# Altium PCB Motor-42-ClosedLoop.PcbDoc
Units mm, origin at the board's own origin, x right, y up, seen from the top; angles counter-clockwise.
Board outline 42 x 42 mm, 2 copper layers (Top Layer, Bottom Layer), stack 1.571 mm thick; 47 components, 20 nets, 212 pads, 76 vias.
Unrouted connection lines stored in the file: 36.
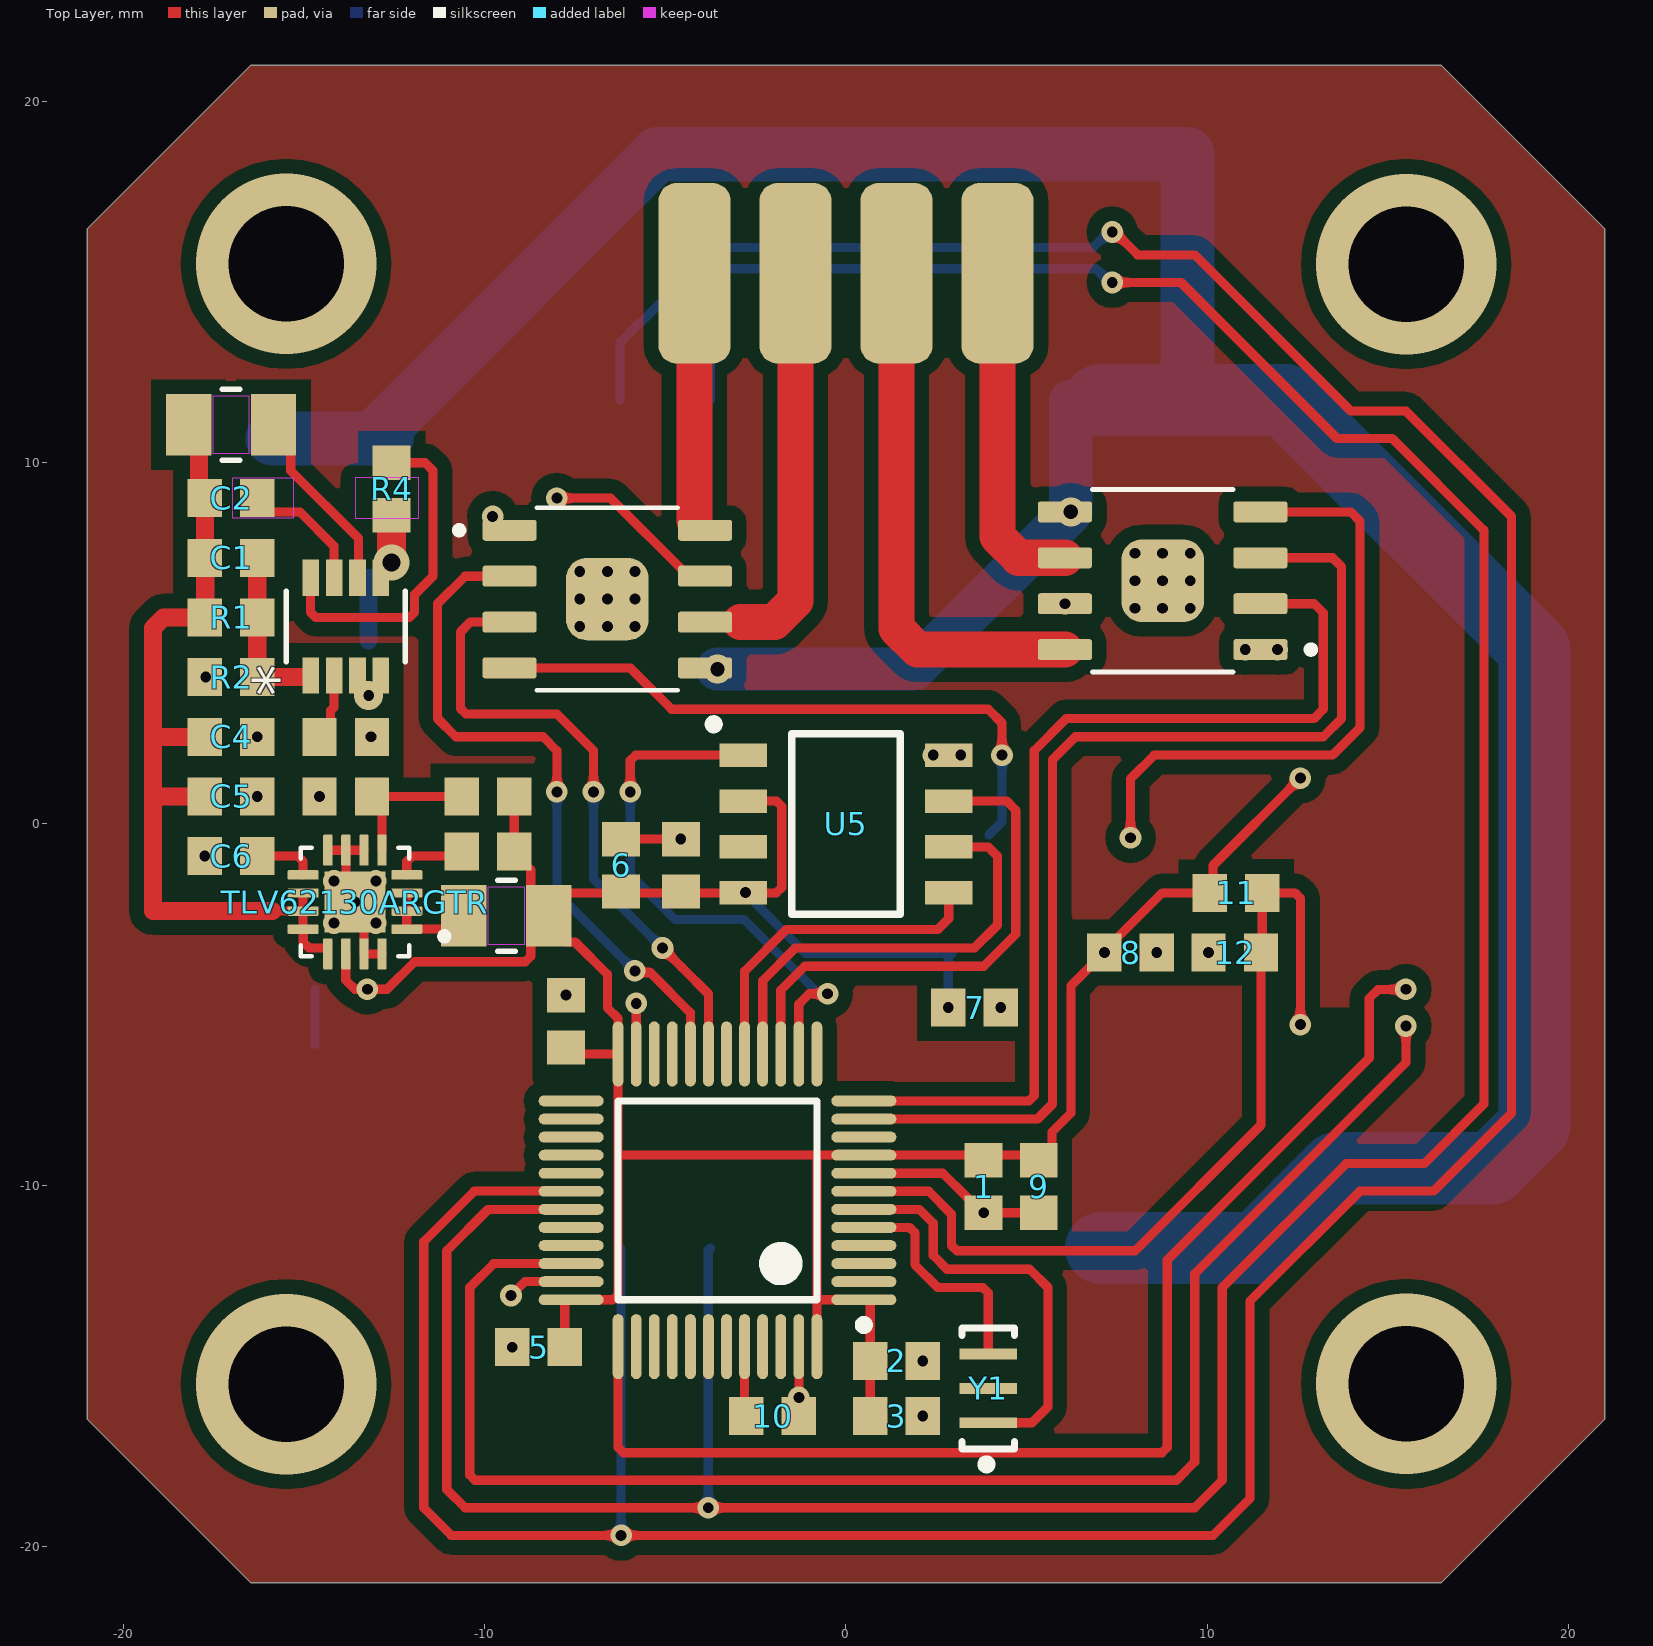
[diagram p0: Top Layer view]
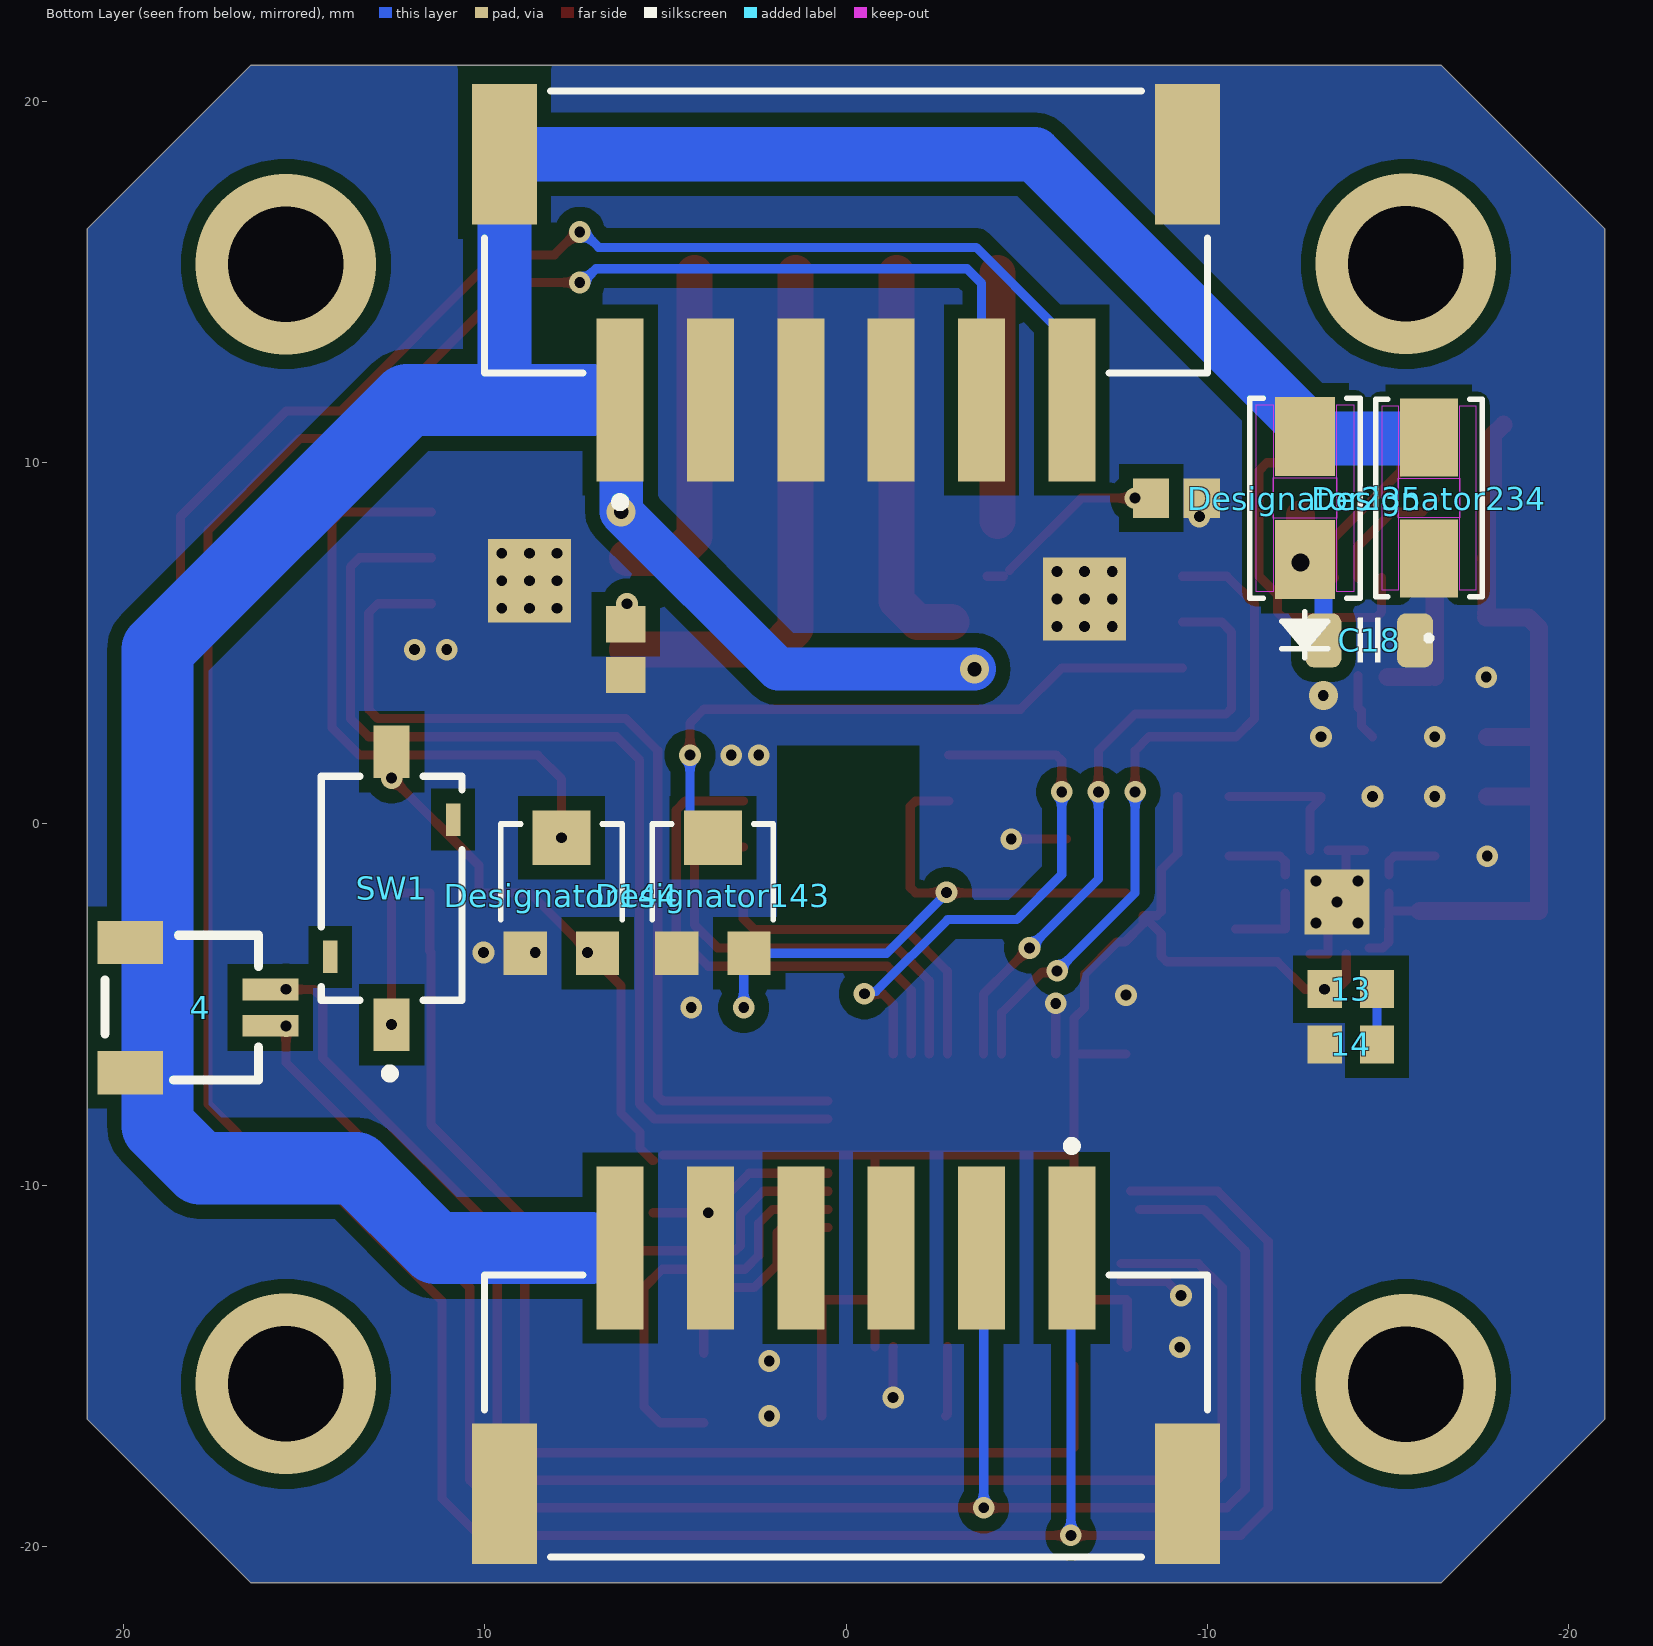
[diagram p1: Bottom Layer view, seen from below]

## Layer stack, top to bottom
Top Solder: solder mask 0.0102, Solder Resist, Dk 3.5
Top Layer: signal copper 0.0356
Dielectric 1: dielectric 1.5, FR-4, Dk 4.8
Bottom Layer: signal copper 0.0356
Bottom Solder: solder mask 0.0102, Solder Resist, Dk 3.5

## Board outline
-21,-16.465 -16.465,-21 16.465,-21 21,-16.465 21,16.465 16.465,21 -16.465,21 -21,16.465

## Design rules (kind name [scope] priority, off if disabled: settings)
Clearance [All] p1: gap=0 ignorepadtopadclearanceinfootprint=TRUE
Clearance Clearance_net [InNetClass('All Nets') vs InNetClass('All Nets')] p2: gap=0.01 ignorepadtopadclearanceinfootprint=FALSE
PolygonConnect [All] p1: connectstyle=Direct reliefconductorwidth=0.254 reliefentries=4 polygonreliefangle="90 Angle" airgapwidth=0.254
RoutingVias [All] p1: holewidth=0.711 width=1.27 viastyle="Through Hole" minholewidth=0.1 minwidth=0.1 maxholewidth=5 maxwidth=5
SolderMaskExpansion [All] p1: expansion=0.102 istentingtop=FALSE
Width [All] p1: maxlimit=3 minlimit=0.254 preferedwidth=0.254
30 further rules are at their usual default settings.

## Classes and differential pairs
component class Motor-42-ClosedLoop: C1 C2 C6 R1 R2 R4 U5

## Components (designator, comment, footprint, x,y, rotation, side; value= is the part's Value field where it differs from the comment)
1 "22uF" CAPC1608X90X35ML10T15 3.81,-10.033 r90 top (schematic designator C5)
2 "22uF" CAPC1608X90X35ML10T15 1.397,-14.859 r0 top (schematic designator C5)
3 "22uF" CAPC1608X90X35ML10T15 1.397,-16.383 r0 top (schematic designator C5)
4 "Comment" SM02B-SRSS-TB(LF)(SN) 17.907,-5.08 r270 bottom
5 "22uF" CAPC1608X90X35ML10T15 -8.509,-14.478 r0 top (schematic designator C5)
6 "22uF" CAPC1608X90X35ML10T15 -6.223,-1.143 r270 top (schematic designator C5)
7 "22uF" CAPC1608X90X35ML10T15 3.556,-5.08 r0 top (schematic designator C5)
8 "22uF" CAPC1608X90X35ML10T15 7.874,-3.556 r0 top (schematic designator C5)
9 "22uF" CAPC1608X90X35ML10T15 5.334,-10.033 r90 top (schematic designator C5)
10 "22uF" CAPC1608X90X35ML10T15 -2.032,-16.383 r0 top (schematic designator C5)
11 "22uF" CAPC1608X90X35ML10T15 10.795,-1.905 r0 top (schematic designator C5)
12 "22uF" CAPC1608X90X35ML10T15 10.758,-3.556 r0 top (schematic designator C5)
13 "22uF" CAPC1608X90X35ML10T15 -13.97,-4.572 r0 bottom (schematic designator C5)
14 "22uF" CAPC1608X90X35ML10T15 -13.97,-6.096 r0 bottom (schematic designator C5)
C1 "12pF" CAPC1608X90X35ML10T15 -17.018,7.366 r180 top
C2 "10nF" CAPC1608X90X35ML10T15 -17.018,9.017 r180 top
C4 "100uF" CAPC1608X90X35ML10T15 -17.018,2.413 r180 top
C5 "22uF" CAPC1608X90X35ML10T15 -4.572,-1.143 r270 top
C5 "22uF" CAPC1608X90X35ML10T15 -7.747,-5.461 r270 top
C5 "10uF" CAPC1608X90X35ML10T15 -17.018,0.762 r180 top (schematic designator C3)
C6 "3.3nF" CAPC1608X90X35ML10T15 -17.018,-0.889 r0 top (schematic designator C4)
C18 "100uF" 1206-CAP -14.478,5.08 r180 bottom value=0.1u (schematic designator C10)
Designator143 "Comment" EVM-3ESX50B14_PAN 3.683,-2.032 r180 bottom
Designator144 "Comment" EVM-3ESX50B14_PAN 7.874,-2.032 r180 bottom
Designator234 "Comment" SDO_DO-214AC_CIP -16.129,9.017 r90 bottom
Designator235 "Comment" SMASeries_LTF -12.7,9.017 r90 bottom
R1 "110K" RESC1608X55X30ML20T20#1 -17.018,5.715 r180 top
R2 "15K" RESC1608X55X30ML20T20#1 -17.018,4.064 r0 top
R3 "47K" RESC1608X55X30ML20T20#1 -13.843,2.413 r180 top
R4 "47K" RESC1608X55X30ML20T20#1 -12.573,9.271 r270 top
R5 "100K" RESC1608X55X30ML20T20#1 -9.906,-0.762 r180 top
R6 "750K" RESC1608X55X30ML20T20#1 -9.906,0.762 r180 top
R7 "240K" RESC1608X55X30ML20T20#2 -9.144,9.017 r180 bottom
R7 "240K" RESC1608X55X30ML20T20#2 6.096,4.826 r90 bottom
R7 "240K" RESC1608X55X30ML20T20#1 -13.843,0.762 r0 top
SW1 "PTS636 SKG25 SMTR LFS" FP-PTS636_SKG25_SMTR_LFS-MFG 12.573,-1.778 r90 bottom
TLV62130ARGTR "Comment" QFN50P300X300X100-17N -13.589,-2.159 r180 top
U5 "MT6816" SOIC127P600X175-8N-8-V 0,0 r0 top
Y1 "" FP-CSTCE_V-MFG 3.937,-15.621 r90 top
? "Comment" IND_EPCOS_B82498F_EPC -9.398,-2.54 r0 top
? "Comment" IND_EPCOS_B82498F_EPC -17.018,11.049 r180 top
? "Comment" FP-S6B-XH-SM4-TB_LF_SN-MFG 0,16.383 r0 bottom
? "Comment" FP-S6B-XH-SM4-TB_LF_SN-MFG 0,-16.383 r180 bottom
? "Comment" SOIC127P599X175-9N 8.763,6.731 r180 top
? "Comment" SOIC127P599X175-9N -6.604,6.223 r0 top
? "Comment" LQFP48_N -3.556,-10.414 r180 top
? "Comment" TSOT_303AIC_SGY -13.843,5.461 r90 top

## Footprints (in the part's own frame and the unit in brackets; to place one, negate y for a bottom-side part, rotate by r counter-clockwise, add the part's x,y. Pads: shape width x height; smd on the part's side, far side on the other; paste and mask are expansions set on the pad)
1206-CAP [mm]
  rrect50% 1x1.5 smd: 1(-1.27,0) 2(1.27,0)
  silkscreen extent -0.3,-0.61 0.3,0.61, body extent -1.5,-0.75 1.5,0.75, height 1.5
CAPC1608X90X35ML10T15 [mm] "Chip Capacitor, 2-Leads, Body 1.60x0.80mm, IPC Low Density"
  rect 0.95x1.05 smd: 1(-0.725,0) 2(0.725,0)
  body extent -0.85,-0.45 0.85,0.45, height 0.9
EVM-3ESX50B14_PAN [mil]
  rect 47x47 smd paste+0 mask+0: 1(-39.38,-60.75) 3(39.37,-60.75)
  rect 62.99x59.06 smd paste+0 mask+0: 2(0,65)
  silkscreen extent -66,-25 66,80
FP-CSTCE_V-MFG [mm]
  rect 0.3x1.6 smd paste+0 mask+0: 1(-0.95,0) 2(0,0) 3(0.95,0)
  silkscreen extent -2.22,-0.72 1.68,0.72, body extent -1.78,-0.9 1.78,0.9, height 0.25
FP-PTS636_SKG25_SMTR_LFS-MFG [mm]
  rect 1.45x1 smd paste+0 mask+0: 1(-3.775,0) 2(3.775,0)
  rect 0.9x0.4 smd paste+0 mask+0: 3(-1.9,1.7) 4(1.9,-1.7)
  silkscreen extent -5.25,-1.95 3.1,1.95, body extent -4,-1.85 4,1.85, height 2.75
FP-S6B-XH-SM4-TB_LF_SN-MFG [mm]
  rect 1.3x4.5 smd paste+0 mask+0: 1(6.25,4.65) 2(3.75,4.65) 3(1.25,4.65) 4(-1.25,4.65) 5(-3.75,4.65) 6(-6.25,4.65)
  rect 1.8x3.9 smd paste+0 mask+0: 7(-9.45,-2.15) 8(9.45,-2.15)
  silkscreen extent -10,-3.9 10,7.6, body extent -9.97,-3.9 9.97,6.1, height 6
IND_EPCOS_B82498F_EPC [mil]
  rect 49.5x67 smd paste+0 mask+0: 1(-46.25,0) 2(46.25,0)
  Top Layer keep-out region: -19.5,-31.5 -19.5,31.5 19.5,31.5 19.5,-31.5
  silkscreen extent -9,-38 9,38, body extent -46,-34 46,34, height 55
LQFP48_N [mm] "Thin QFP, 48-Leads, Body 7x7mm, Pitch 0.5mm, IPC Medium Density"
  oval 1.8x0.3 smd: 1(-4.05,2.75) 2(-4.05,2.25) 3(-4.05,1.75) 4(-4.05,1.25) 5(-4.05,0.75) 6(-4.05,0.25) 7(-4.05,-0.25) 8(-4.05,-0.75) 9(-4.05,-1.25) 10(-4.05,-1.75) 11(-4.05,-2.25) 12(-4.05,-2.75) 25(4.05,-2.75) 26(4.05,-2.25) 27(4.05,-1.75) 28(4.05,-1.25) 29(4.05,-0.75) 30(4.05,-0.25) 31(4.05,0.25) 32(4.05,0.75) 33(4.05,1.25) 34(4.05,1.75) 35(4.05,2.25) 36(4.05,2.75)
  oval 0.3x1.8 smd: 13(-2.75,-4.05) 14(-2.25,-4.05) 15(-1.75,-4.05) 16(-1.25,-4.05) 17(-0.75,-4.05) 18(-0.25,-4.05) 19(0.25,-4.05) 20(0.75,-4.05) 21(1.25,-4.05) 22(1.75,-4.05) 23(2.25,-4.05) 24(2.75,-4.05) 37(2.75,4.05) 38(2.25,4.05) 39(1.75,4.05) 40(1.25,4.05) 41(0.75,4.05) 42(0.25,4.05) 43(-0.25,4.05) 44(-0.75,4.05) 45(-1.25,4.05) 46(-1.75,4.05) 47(-2.25,4.05) 48(-2.75,4.05)
  silkscreen extent -4.18,-2.75 2.75,3.57, body extent -3.5,-3.5 3.5,3.5, height 1.6
QFN50P300X300X100-17N [mm]
  rrect25% 0.86x0.26 smd: 1(-1.435,0.75) 2(-1.435,0.25) 3(-1.435,-0.25) 4(-1.435,-0.75) 9(1.435,-0.75) 10(1.435,-0.25) 11(1.435,0.25) 12(1.435,0.75)
  rrect25% 0.26x0.86 smd: 5(-0.75,-1.435) 6(-0.25,-1.435) 7(0.25,-1.435) 8(0.75,-1.435) 13(0.75,1.435) 14(0.25,1.435) 15(-0.25,1.435) 16(-0.75,1.435)
  rect 1.68x1.68 smd paste-0.31: 17(0,0)
  round 0.4 hole 0.3 mask+0: 18(0,0) 19(-0.58,0.58) 20(0.58,0.58) 21(-0.58,-0.58) 22(0.58,-0.58)
  silkscreen extent -2.57,-1.5 1.5,1.5, body extent -1.5,-1.5 1.5,1.5, height 1
RESC1608X55X30ML20T20#1 [mm] "Chip Resistor, 2-Leads, Body 1.60x0.80mm, IPC Low Density"
  rect 0.95x1.05 smd: 1(-0.725,0) 2(0.725,0)
  body extent -0.9,-0.5 0.9,0.5, height 0.55
RESC1608X55X30ML20T20#2 [mm] "Chip Resistor, 2-Leads, Body 1.60x0.80mm, IPC Low Density"
  rect 1x1.1 smd: 1(-0.7,0) 2(0.7,0)
  body extent -0.9,-0.5 0.9,0.5, height 0.55
SDO_DO-214AC_CIP [mil]
  rect 85x63 smd paste+0 mask+0: 1(-66,0) 2(66,0)
  Top Layer keep-out region: -100.5,-51 -100.5,-33.5 100.5,-33.5 100.5,-51
  Top Layer keep-out region: -100.5,33.5 -100.5,51 100.5,51 100.5,33.5
  Top Layer keep-out region: -21.5,-33.5 -21.5,33.5 21.5,33.5 21.5,-33.5
  Keep-Out Layer region: -21.5,-33.5 -21.5,33.5 21.5,33.5 21.5,-33.5
  silkscreen extent -155,-58 108,58, body extent -103,-53 103,53, height 89
SM02B-SRSS-TB(LF)(SN) [mm]
  rect 0.6x1.55 smd: 1(-0.5,1.975) 2(0.5,1.975)
  rect 1.2x1.8 smd: 3(-1.8,-1.9) 4(1.8,-1.9)
  silkscreen extent -2,-2.6 2,1.65
SMASeries_LTF [mil]
  rect 86x65 smd paste+0 mask+0: 1(-67,0) 2(67,0)
  Top Layer keep-out region: -102,-53 -102,-34.5 102,-34.5 102,-53
  Top Layer keep-out region: -102,34.5 -102,53 102,53 102,34.5
  Top Layer keep-out region: -22,-34.5 -22,34.5 22,34.5 22,-34.5
  Keep-Out Layer region: -22,-34.5 -22,34.5 22,34.5 22,-34.5
  silkscreen extent -174,-60 109,60, body extent -104,-55 104,55, height 92
SOIC127P599X175-9N [mm]
  rrect25% 1.5x0.58 smd: 1(-2.705,1.905) 2(-2.705,0.635) 3(-2.705,-0.635) 4(-2.705,-1.905) 5(2.705,-1.905) 6(2.705,-0.635) 7(2.705,0.635) 8(2.705,1.905)
  rrect50% 2.285x2.285 smd paste-2: 9(0,0)
  silkscreen extent -4.2,-2.52 1.95,2.52, body extent -3,-2.45 3,2.45, height 1.75
SOIC127P600X175-8N-8-V [mm]
  rect 1.31x0.65 smd: 1(-2.845,1.905) 2(-2.845,0.635) 3(-2.845,-0.635) 4(-2.845,-1.905) 5(2.845,-1.905) 6(2.845,-0.635) 7(2.845,0.635) 8(2.845,1.905)
  silkscreen extent -3.78,-2.5 1.5,2.88, body extent -3,-2.5 3,2.5, height 1.75
TSOT_303AIC_SGY [mil]
  rect 39.5x18 smd paste+0 mask+0: 1(-53.25,38.39) 2(-53.25,12.8) 3(-53.25,-12.8) 4(-53.25,-38.39) 5(53.25,-38.39) 7(53.25,12.8) 8(53.25,38.39)
  rect 39.5x18 smd paste+0: 6(53.25,-12.8)
  silkscreen extent -39,-65 39,65, body extent -59,-60 59,60, height 43

## Part data
1 2 3 5 6 7 8 9 10 11 12 13 14 C1 C2 C4 C5 C5 C5 C6: library part CMP-2006-02924-1, Manufacturer=Murata, PART NUMBER=GRM188R71H472KA01D
C18: library part µçÈÝ-1206, "Capacitor"
R1 R2 R3 R4 R5 R6 R7 R7 R7: library part CMP-2000-00054-1, Manufacturer=Panasonic, PART NUMBER=ERA3AEB392V
SW1: library part CMP-10040-000025-1, "TACT 6.0 X 3.5, 2.5 MM H, 250GF,"
U5: library part TLE5012B_E1000, "TLE5012B/TLI5012B Angular and Linear Position Sensor Evaluation Board Automotive", Package="SOIC-8 Infineon Technologies", Availability="In Stock", Check_prices=https://www.snapeda.com/parts/TLE5012B%20E1000/Infineon+Technologies/view-part/?ref=eda, MF="Infineon Technologies", MP="TLE5012B E1000", Price=None, SnapEDA_Link=https://www.snapeda.com/parts/TLE5012B%20E1000/Infineon+Technologies/view-part/?ref=snap
Y1: library part CMP-06057-000013-1, "CERAMIC RES 20.0000MHZ 15PF SMD", Capacitance=15pF, Case/Package=SMD/SMT, Frequency=20MHz, Frequency Stability=0.3%, Frequency Tolerance=0.5%, Max Operating Temperature=80°C, Min Operating Temperature=-20°C, Package Quantity=3000, Resistor Type=Ceramic, Contact Plating=Gold, Height=0.039inch, Impedance=40R, Lead Free="Lead Free", Length=0.126inch, Load Capacitance=15pF, Mount="Surface Mount", Number of Pins=3, Packaging="Tape and Reel", REACH SVHC="No SVHC", Self Resonant Frequency=20MHz, Termination=SMD/SMT, Tolerance=0.5%, Width=0.051inch

## Free pads (board coordinates)
  rrect50% 2x5 smd: 5(-4.191,15.24) 5(-1.397,15.24) 5(1.397,15.24) 5(4.191,15.24)
  rect 2.3x2.3 smd far side: 7(-6.604,6.223) 7(8.763,6.731)
  rect 1.8x1.8 smd far side: 8(-13.589,-2.159)

## Via types
v1: diameter 0.6, hole 0.3, Top Layer to Bottom Layer, 68 vias
v2: diameter 5, hole 3.2, Top Layer to Bottom Layer, 4 vias
v3: diameter 0.8, hole 0.4, Top Layer to Bottom Layer, 2 vias
v4: diameter 1, hole 0.5, Top Layer to Bottom Layer, 1 vias
v5: diameter 0.8, hole 0.3, Top Layer to Bottom Layer, 1 vias

## Nets (pads, with @x,y where several pads share a name; then routed paths per layer and width w, separated by ;. In a path a pad name is that pad's centre, name@x,y a point inside that pad or via, vN(x,y) a via of type N, cw(c..) or ccw(c..) an arc to the next point about the centre after c; other vN are vias at no path point)
CANH: ?.1@-6.25,-11.733 ?.6@-6.25,11.733 ?.30 | length 105.5
  Top Layer w0.254: ?.30@-7.874,-10.16 -10.287,-10.16 -11.684,-11.557 -11.684,-18.923 -10.922,-19.685 v1(-6.223,-19.685) 10.16,-19.685 11.176,-18.669 11.176,-13.208 14.224,-10.16 16.256,-10.16 18.415,-8.001 18.415,-2.413 18.415,-1.274 18.415,8.509 15.494,11.43 13.97,11.43 9.652,15.748 8.069,15.748 7.434,16.383 v1(7.366,16.383)
  Bottom Layer w0.254: ?.1@-6.25,-11.733 -6.223,-11.76 v1(-6.223,-19.685) ; ?.6@-6.25,11.733 -6.25,13.333 -5.727,13.856 -5.702,13.856 -3.6,15.958 6.847,15.958 7.272,16.383 v1(7.366,16.383)
CANL: ?.2@-3.75,-11.733 ?.5@-3.75,11.733 ?.31 | length 97.6
  Top Layer w0.254: ?.31@-8.128,-10.668 -9.906,-10.668 -11.049,-11.811 -11.049,-18.415 -10.541,-18.923 v1(-3.81,-18.923) 9.652,-18.923 10.414,-18.161 10.414,-12.827 13.843,-9.398 16.002,-9.398 17.653,-7.747 17.653,8.128 15.113,10.668 13.589,10.668 9.271,14.986 v1(7.366,14.986)
  Bottom Layer w0.254: v1(-3.81,-18.923) -3.81,-11.793 ?.2@-3.75,-11.733 ; ?.5@-3.75,11.733 -3.75,14.964 -3.347,15.367 6.917,15.367 7.298,14.986 v1(7.366,14.986)
GND: 1.1 2.2 3.2 5.1 6.1 7.2 8.2 9.1 10.2 12.1 14.2 ?.1@11.468,4.826 ?.1@-9.309,8.128 ?.2@3.75,11.733 ?.3@1.25,11.733 ?.3@-13.518,4.108 ?.4@-1.25,11.733 ?.4@-12.868,4.108 ?.5@3.75,-11.733 ?.7@9.45,-18.533 ?.7@-9.45,18.533 ?.8@0.494,-9.664 ?.8@-9.45,-18.533 ?.9@8.763,6.731 ?.9@-6.604,6.223 ?.23 ?.35 ?.47 C4.1 C5.1 C6.1 C18.2 Designator143.1 Designator144.1 Designator234.1 pad.7 pad.8 R2.1 R3.1 R7.1@6.096,4.126 R7.1@-14.568,0.762 R7.2@-9.844,9.017 TLV62130ARGTR.6 TLV62130ARGTR.7 TLV62130ARGTR.8 TLV62130ARGTR.15 TLV62130ARGTR.16 TLV62130ARGTR.17 TLV62130ARGTR.18 TLV62130ARGTR.19 TLV62130ARGTR.20 TLV62130ARGTR.21 TLV62130ARGTR.22 U5.8 | length 15.5
  Top Layer w0.254: TLV62130ARGTR.8 TLV62130ARGTR.7 ; TLV62130ARGTR.6 TLV62130ARGTR.7 ; TLV62130ARGTR.16 TLV62130ARGTR.15 -13.339,-2.449 -13.589,-2.199 v1(-13.589,-2.159) -13.589,-2.119 -13.839,-1.869 TLV62130ARGTR.7 ; v1(-9.271,-13.048) -8.887,-12.664 ?.35 ; 6.1@-6.096,-0.418 v1(-4.572,-0.418) ; ?.23 v1(-5.806,-4.963) ; ?.47 -1.297,-14.473 -1.297,-15.848 10.2@-1.27,-15.875 ; ?.8@0.494,-9.664 2.679,-9.664 1.1@3.366,-10.351 ; 1.1@3.76,-10.758 v1(3.81,-10.758) 9.1
  other v1: 2.122,-16.383 -1.304,-15.872 2.122,-14.859 -9.234,-14.478 4.281,-5.08 -7.747,-4.736 8.599,-3.556 10.033,-3.556 -14.169,-2.739 -13.009,-2.739 -14.169,-1.579 -13.009,-1.579 -17.743,-0.889 -16.293,0.762 -14.568,0.762 2.413,1.905 3.175,1.905 -16.293,2.413 -13.143,2.413 -17.718,4.064 11.049,4.826 11.938,4.826 -7.366,5.461 -6.604,5.461 -5.842,5.461 8.001,5.969 8.763,5.969 9.525,5.969 -7.366,6.223 -6.604,6.223 -5.842,6.223 8.001,6.731 8.763,6.731 9.525,6.731 -7.366,6.985 -6.604,6.985 -5.842,6.985 8.001,7.493 8.763,7.493 9.525,7.493 -9.779,8.509
  other v5: -13.208,3.556
NetC1_1: ?.1@-14.818,4.108 C1.1 R1.1 R2.2 | length 4.4
  Top Layer w0.5: R2.2 R1.1 ; R1.1@-16.293,5.74 C1.1 ; R2.2@-16.129,4.064 ?.1@-14.986,4.064
NetC2_1: ?.7@-14.168,6.814 C2.1 | length 3.6
  Top Layer w0.254: C2.1 -16.293,8.984 -15.945,8.636 -15.113,8.636 -14.168,7.691 ?.7@-14.168,6.814
NetC4_2: C6.2 TLV62130ARGTR.9 | length 1.7
  Top Layer w0.254: C6.2 -15.173,-0.889 -15.024,-1.038 TLV62130ARGTR.9
NetL1_1: ?.1@-15.843,11.049 ?.6@-13.518,6.814 | length 4.3
  Top Layer w0.254: ?.1@-15.367,10.287 -15.367,9.779 -13.491,7.903 -13.491,6.841 ?.6@-13.518,6.814
NetL2_1: ?.1@-10.573,-2.54 TLV62130ARGTR.1 TLV62130ARGTR.2 TLV62130ARGTR.3 | length 2.4
  Top Layer w0.254: TLV62130ARGTR.3 TLV62130ARGTR.2 TLV62130ARGTR.1 ?.1@-10.774,-2.909
NetP1_2: 4.1 ?.37 | length 33.4
  Top Layer w0.254: ?.37@-6.306,-15.007 -6.306,-17.25 -6.157,-17.399 8.741,-17.399 8.89,-17.25 8.89,-12.065 14.478,-6.477 14.478,-4.826 14.724,-4.58 v1@15.494,-4.58
  other v1: 15.494,-4.572
NetP1_3: 4.2 ?.34 | length 43.1
  Top Layer w0.254: ?.34 -9.751,-12.164 -10.414,-12.827 -10.414,-18.012 -10.265,-18.161 9.144,-18.161 9.652,-17.653 9.652,-12.446 15.494,-6.604 v1@15.494,-5.58
  other v1: 15.494,-5.588
NetR3_2: ?.2@-14.168,4.108 R3.2 | length 1.9
  Top Layer w0.254: R3.2 -14.262,2.719 -14.262,3.137 -14.168,3.231 ?.2@-14.168,4.108
NetR4_1: ?.8@-14.818,6.814 R4.1 | length 9.3
  Top Layer w0.254: ?.8@-14.818,6.814 -14.818,5.864 -14.669,5.715 -12.087,5.715 -11.938,5.864 -11.938,6.35 -11.43,6.858 -11.43,9.779 -11.647,9.996 R4.1
NetR5_2: R5.2 TLV62130ARGTR.4 | length 2
  Top Layer w0.254: TLV62130ARGTR.4 -12.154,-1.038 -12.005,-0.889 R5.2@-10.606,-0.889
NetR6_2: R6.2 R7.2@-13.118,0.762 TLV62130ARGTR.5 | length 4.1
  Top Layer w0.254: R7.2@-13.143,0.712 -12.839,0.408 TLV62130ARGTR.5 ; R7.2@-13.143,0.762 R6.2@-10.606,0.762
NetU3_1: ?.33
NetU3_4: ?.32
NetU3_8: ?.25
VCC_3V3: 1.2 2.1 3.1 5.2 6.2 7.1 8.1 9.2 11.1 13.2 ?.1@0.494,-13.164 ?.2@-8.223,-2.54 ?.9@0.494,-9.164 ?.24 ?.36 ?.48 C5.2@-4.572,-1.868 C5.2@-7.747,-6.186 Designator143.3 Designator144.3 R5.1 R6.1 SW1.2 TLV62130ARGTR.14 U5.2 U5.4 | length 80.3
  Top Layer w0.254: TLV62130ARGTR.14 -13.841,-3.596 -13.841,-4.32 -13.589,-4.572 -12.7,-4.572 -11.938,-3.81 -8.874,-3.81 -8.725,-3.661 -8.725,-3.042 ?.2@-8.223,-2.54 ; R6.1 R5.1 -9.181,-0.812 -8.725,-1.268 -8.725,-2.418 -8.603,-2.54 ?.2@-8.223,-2.54 ; 5.2 -7.784,-13.185 -7.763,-13.164 ?.36 -6.455,-13.164 -6.306,-13.015 ?.24 ; C5.2@-7.747,-6.364 ?.24 ; ?.2@-7.747,-1.905 U5.4 U5.4@-2.781,-1.905 ; -6.223,-9.164 -0.806,-9.164 ; U5.2 -1.927,0.635 -1.778,0.486 -1.778,-1.756 -1.927,-1.905 U5.4@-2.781,-1.905 ; v1(-2.781,-1.892) U5.4@-2.781,-1.905 ; ?.48 -0.806,-13.208 ; 3.1 2.1 0.672,-13.185 0.651,-13.164 0.494,-13.164 -0.762,-13.164 -0.806,-13.208 ; 9.2@5.06,-9.164 0.494,-9.164 -0.806,-9.164 ; 9.2 5.356,-9.308 5.704,-8.96 5.704,-8.52 6.223,-8.001 6.223,-4.482 v1(7.149,-3.556) 7.149,-3.506 8.75,-1.905 11.1 10.155,-1.82 10.155,-1.148 v1(12.573,1.27) ; ?.2@-8.223,-2.54 -8.223,-2.762 -7.722,-3.264 -7.499,-3.264 -6.604,-4.159 -6.604,-5.08 -6.309,-5.375 -6.309,-6.361 ?.24 ; -0.806,-13.208 -0.806,-9.164
  Bottom Layer w0.254: v1(-2.781,-1.892) -2.781,-1.918 -1.124,-3.575 Designator143.3 2.937,-3.575 2.831,-3.681 v1(2.831,-5.08)
  other v1: -13.245,-4.572
VCC_5V: ?.2@-18.193,11.049 C1.2 C2.2 C4.2 C5.2@-17.743,0.762 R1.2 TLV62130ARGTR.10 TLV62130ARGTR.11 TLV62130ARGTR.12 TLV62130ARGTR.13 | length 23.7
  Top Layer w0.254: -15.875,-2.413 -15.871,-2.409 TLV62130ARGTR.11 ; TLV62130ARGTR.12 TLV62130ARGTR.11 ; TLV62130ARGTR.10 TLV62130ARGTR.11 ; TLV62130ARGTR.12@-15.017,-2.912 -15.017,-3.271 -14.859,-3.429 -14.478,-3.429
  Top Layer w0.5: -19.136,0.762 C5.2@-17.743,0.762 ; ?.2@-18.193,11.049 -17.907,10.763 -17.907,9.181 C2.2 C1.2 ; C4.2 -19.177,2.413 ; R1.2@-17.718,5.715 -18.884,5.715 -19.177,5.422 -19.177,2.413 ; R1.2@-17.718,5.842 -17.73,5.854 -17.73,7.328 C1.2@-17.718,7.341 ; -15.875,-2.413 -19.177,-2.413 -19.177,2.413
VCC_24V: 4.3 4.4 ?.1@6.25,11.733 ?.5@6.058,8.636 ?.5@-3.899,4.318 ?.5@-12.868,6.814 ?.6@6.25,-11.733 ?.8@9.45,18.533 C18.1 Designator234.2 Designator235.1 Designator235.2 R4.2 | length 95.7
  Top Layer w0.8: v4(-12.573,7.239) R4.2
  Bottom Layer w0.254: Designator235.1@-13.208,6.807 Designator235.1 ; ?.8@8.933,19.05 ?.8@9.45,18.533 ; 9.45,12.062 9.779,11.733
  Bottom Layer w0.5: C18.1 Designator235.1@-13.208,6.807
  Bottom Layer w1.2: v3(-3.556,4.288) 1.875,4.288 v3(6.223,8.636) ?.1@6.223,11.706
  Bottom Layer w1.5: Designator234.2@-15.869,10.668 Designator235.2@-13.208,10.668 ; Designator235.2 -12.7,11.049 -5.216,18.533 ?.8@9.45,18.533 ; 9.45,12.062 ?.8@9.45,18.438
  Bottom Layer w2: 7.034,11.733 9.779,11.733 12.143,11.733 19.05,4.826 19.05,-3.28 19.05,-6.88 19.05,-8.353 17.878,-9.525 13.567,-9.525 11.359,-11.733 7.063,-11.733
pads on no net: 10.1 11.2 12.2 13.1 14.1 ?.2@0.494,-12.664 ?.2@11.468,6.096 ?.2@-9.309,6.858 ?.3@0.494,-12.164 ?.3@11.468,7.366 ?.3@-1.25,-11.733 ?.3@-9.309,5.588 ?.4@0.494,-11.664 ?.4@1.25,-11.733 ?.4@11.468,8.636 ?.4@-9.309,4.318 ?.5@0.494,-11.164 ?.6@0.494,-10.664 ?.6@6.058,7.366 ?.6@-3.899,5.588 ?.7@0.494,-10.164 ?.7@6.058,6.096 ?.7@-3.899,6.858 ?.8@6.058,4.826 ?.8@-3.899,8.128 ?.10 ?.11 ?.12 ?.13 ?.14 ?.15 ?.16 ?.17 ?.18 ?.19 ?.20 ?.21 ?.22 ?.26 ?.27 ?.28 ?.29 ?.38 ?.39 ?.40 ?.41 ?.42 ?.43 ?.44 ?.45 ?.46 Designator143.2 Designator144.2 R7.1@-8.444,9.017 R7.2@6.096,5.526 SW1.1 SW1.3 SW1.4 U5.1 U5.3 U5.5 U5.6 U5.7 Y1.1 Y1.2 Y1.3
copper on no net: | length 273
  Top Layer w0.254: -9.309,4.318 -5.969,4.318 -4.826,3.175 3.937,3.175 4.318,2.794 v1(4.318,1.905) ; -9.309,5.588 -10.395,5.588 -10.668,5.315 -10.668,3.197 -10.519,3.048 -8.001,3.048 -6.985,2.032 v1(-6.985,0.889) ; -9.309,6.858 -10.541,6.858 -11.303,6.096 -11.303,2.921 -10.795,2.413 -8.382,2.413 -8.001,2.032 v1(-8.001,0.889) ; v1(-8.001,9.017) -6.518,9.017 -4.522,7.021 ; v1(-5.969,0.889) -5.969,1.756 -5.82,1.905 -2.845,1.905 ; v1(-5.842,-4.064) -5.795,-4.111 -5.414,-4.111 -4.306,-5.219 -4.306,-6.364 ; v1(-5.08,-3.429) -4.546,-3.963 -3.806,-4.703 -3.806,-6.36 ; -4.359,6.858 -3.899,6.858 ; -2.806,-14.464 -2.806,-16.334 -2.757,-16.383 ; -2.806,-6.364 -2.806,-4.076 -1.651,-2.921 2.54,-2.921 2.845,-2.616 2.845,-1.905 ; -2.306,-6.364 -2.306,-4.338 -1.397,-3.429 3.556,-3.429 4.191,-2.794 4.191,-0.889 3.937,-0.635 2.845,-0.635 ; -1.806,-6.364 -1.806,-4.6 -1.143,-3.937 3.81,-3.937 4.699,-3.048 4.699,0.381 4.445,0.635 2.845,0.635 ; -1.306,-6.364 -1.306,-4.989 -1.266,-4.949 -1.016,-4.699 v1(-0.508,-4.699) ; 0.494,-11.164 1.756,-11.164 1.905,-11.313 1.905,-12.192 2.54,-12.827 3.788,-12.827 3.937,-12.976 3.937,-14.648 ; 0.494,-10.664 2.028,-10.664 2.413,-11.049 2.413,-11.938 2.794,-12.319 5.08,-12.319 5.588,-12.827 5.588,-16.129 5.245,-16.472 5.146,-16.571 3.937,-16.571 ; 0.494,-10.164 2.29,-10.164 2.921,-10.795 2.921,-11.662 3.07,-11.811 8.001,-11.811 11.483,-8.329 11.483,-3.556 11.52,-3.519 11.52,-1.905 12.424,-1.905 12.573,-2.054 12.573,-3.81 v1(12.573,-5.553) ; 0.494,-8.164 5.298,-8.164 5.715,-7.747 5.715,1.778 6.35,2.413 13.208,2.413 13.716,2.921 13.716,7.112 13.462,7.366 11.468,7.366 ; 0.494,-7.664 5.058,-7.664 5.207,-7.515 5.207,2.032 6.096,2.921 12.954,2.921 13.208,3.175 13.208,5.842 12.954,6.096 11.468,6.096 ; v1(7.874,-0.381) 7.874,1.248 8.531,1.905 13.462,1.905 14.224,2.667 14.224,8.382 13.97,8.636 11.468,8.636
  Top Layer w1: -4.191,8.382 -4.191,15.24 ; -2.921,5.588 -1.983,5.588 -1.397,6.174 -1.397,15.24 ; 1.397,15.24 1.397,5.412 1.983,4.826 6.058,4.826 ; 4.191,15.24 4.191,7.952 4.777,7.366 6.058,7.366
  Bottom Layer w0.254: -14.695,-6.096 -14.695,-4.572 ; v1(-8.001,0.889) -8.001,-1.905 v1(-5.842,-4.064) ; v1(-6.985,0.889) -6.985,-1.524 v1(-5.08,-3.429) ; v1(-5.969,0.889) -5.969,-1.397 -4.721,-2.645 -2.816,-2.645 -0.828,-4.633 -0.574,-4.633 v1(-0.508,-4.699) ; 3.953,-0.305 4.318,0.06 v1(4.318,1.905)
  other v1: 6.058,6.096
  other v2: -15.494,-15.5 15.5,-15.494 -15.494,15.5 15.5,15.494

## Polygon pours and split planes (outlines as drawn)
GND on Bottom Layer "GND_L02_P003" (solid, pour order 3): -21,-16.465 -16.465,-21 16.465,-21 21,-16.465 21,16.465 16.465,21 -16.465,21 -21,16.465
no net on Top Layer "NONET_L01_P001" (solid, pour order 1): -21,-16.465 -16.465,-21 16.465,-21 21,-16.465 21,16.465 16.465,21 -16.465,21 -21,16.465

## Other copper
Top Layer:
  pour cut-out: -10.16,-13.081 -10.16,-17.653 -9.779,-18.034 -0.635,-18.034 -0.635,-13.379 -0.806,-13.208
  pour cut-out: -8.636,0.635 -8.509,0.508 -6.477,0.508 -6.477,-1.397 -6.985,-1.905 -7.15,-1.74 -8.903,-1.74
  pour cut-out: 13.11,-5.103 13.134,-5.08 13.97,-5.08 13.97,-7.62 13.261,-8.329 11.483,-8.329 11.483,-5.514 11.303,-5.334
  pour cut-out: -8.636,4.318 -8.636,2.286 -3.302,2.286 -3.899,2.883 -3.899,4.318
  pour cut-out: -5.08,-2.286 -4.826,-2.54 -1.143,-2.54 -3.81,-5.207
  pour cut-out: -5.969,-7.366 -5.842,-7.493 -5.842,-13.462 -0.508,-13.462 -0.381,-13.335 -0.381,-7.366
  pour cut-out: 1.79,2.63 -1.79,2.63 -1.79,-2.294 -1.692,-2.392 -1.684,-2.384 1.79,-2.384
Bottom Layer:
  pour cut-out: 6.731,15.113 6.731,12.573 9.398,12.573 9.144,12.827 9.144,15.748
  pour cut-out: -9.978,15.371 -9.978,13.716 -9.271,13.716 -8.128,14.859 -8.221,14.952 -8.221,15.503
  pour cut-out: 1.905,2.159 1.905,-2.667 -2.032,-2.667 -2.032,2.159

## Silkscreen, mask and mechanical layers (free items; w line width, h text height)
Mechanical 1:
  the board outline again, w0.2

## Text inside footprints (layer, text, board x,y; h text height)
?: Top Overlay "*" at -15.148,3.537 h1.27 r90; Mechanical 13 "*" at -14.021,4.674 h1.27 r90